# Altium PCB met_dec_pcb.PcbDoc
Units mm, origin at the board's own origin, x right, y up, seen from the top; angles counter-clockwise.
Board outline 90.93 x 38.1 mm, 2 copper layers (Top Layer, Bottom Layer); 8 components, 6 nets, 22 pads, 3 vias.
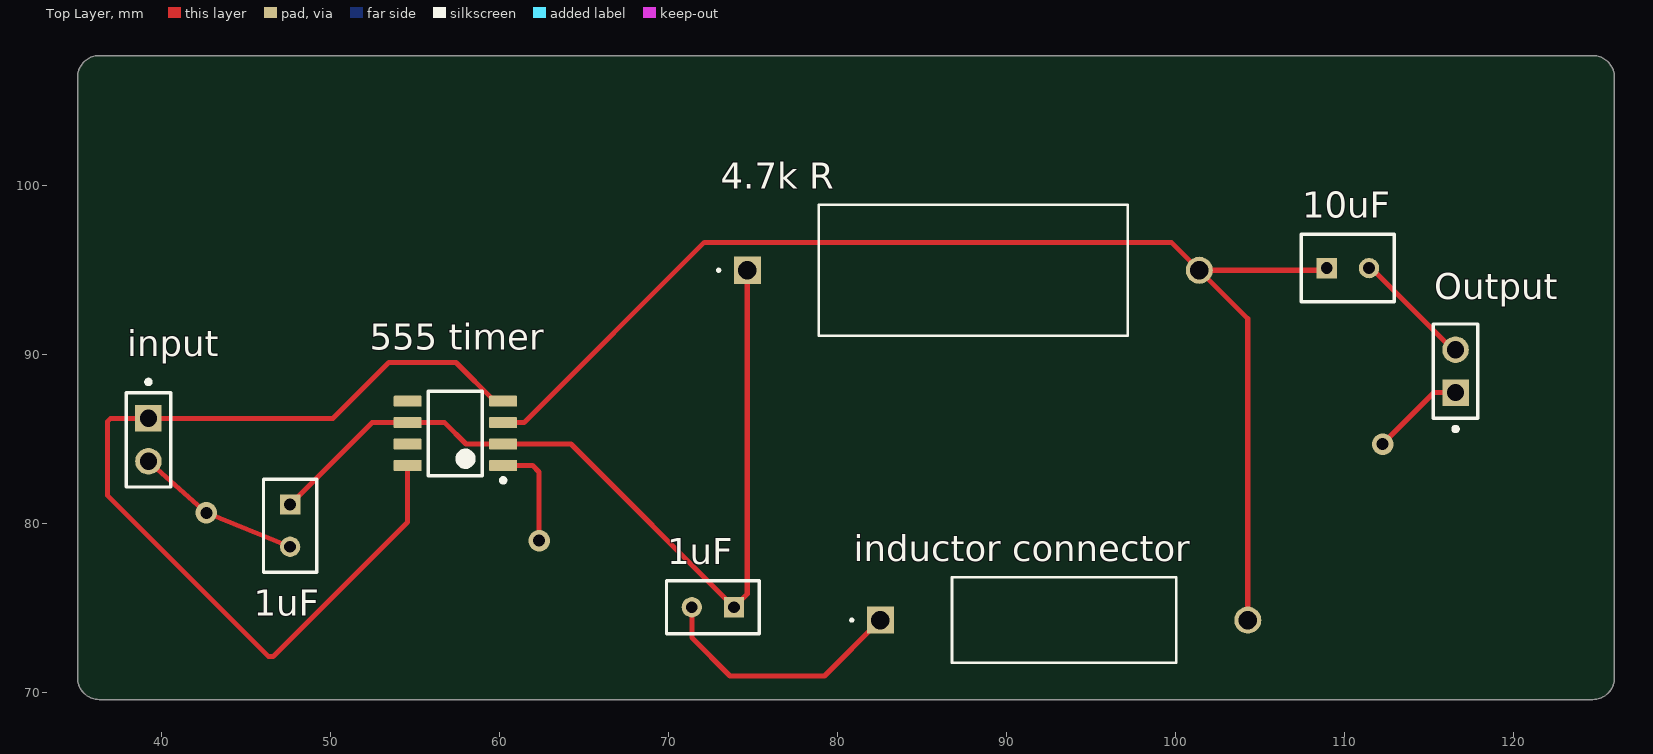
[diagram p0: Top Layer view]
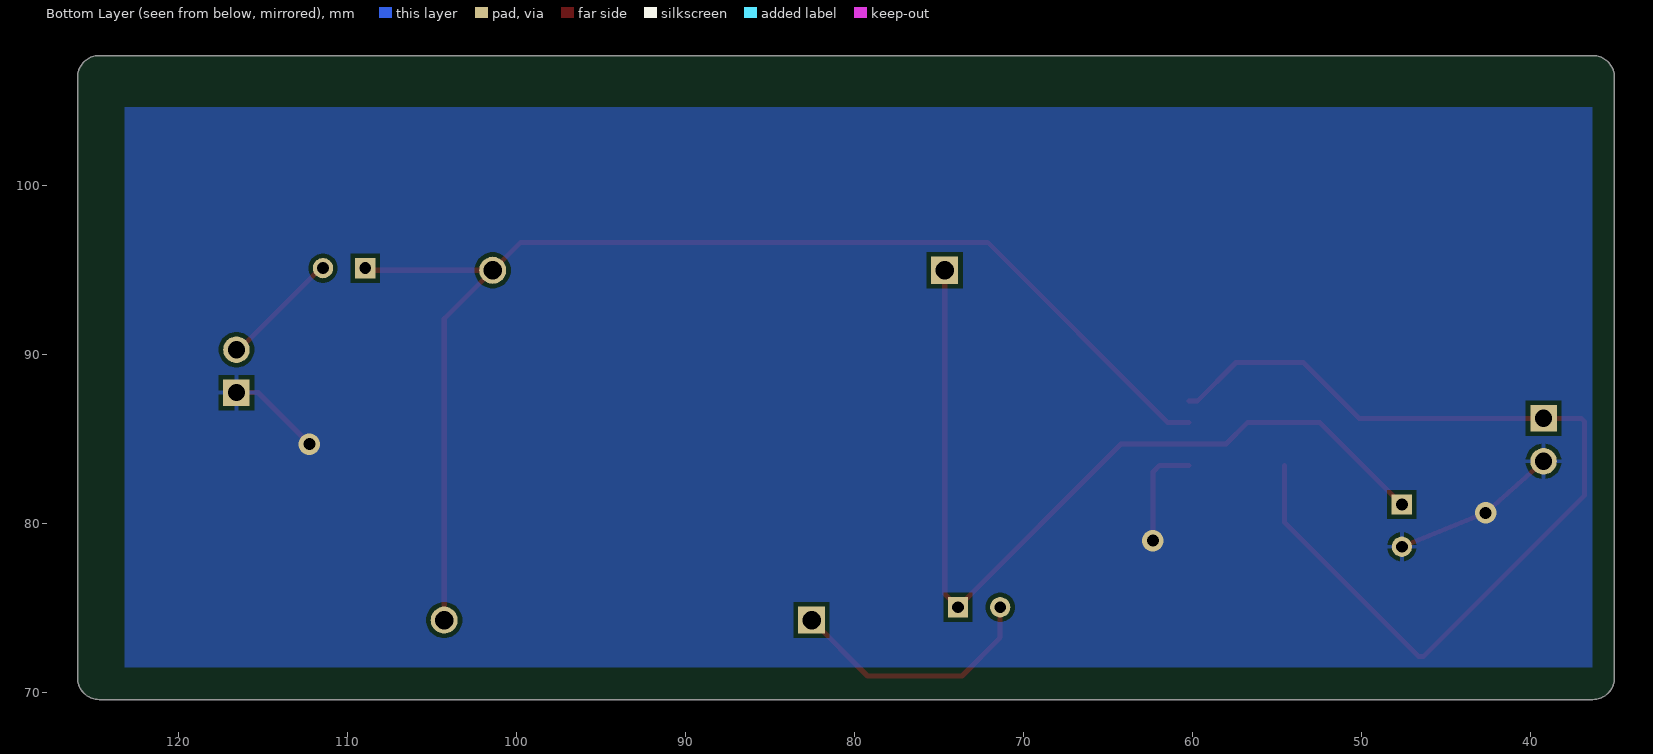
[diagram p1: Bottom Layer view, seen from below]
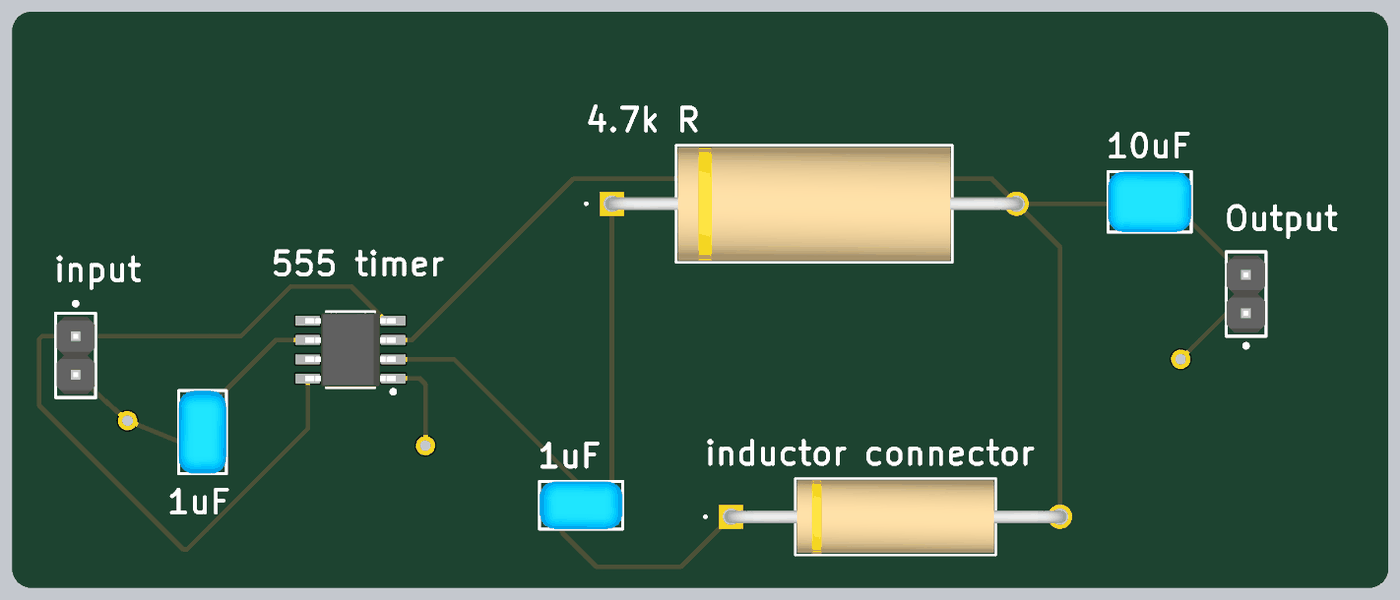
[diagram p2: 3D render of the assembled board from above, using the file's embedded part models]

## Layer stack, top to bottom
Top Solder: solder mask 0.0102, Solder Resist, Dk 3.5
Top Layer: signal copper 0.0356
Dielectric 1: dielectric 0.32, FR-4, Dk 4.8
Bottom Layer: signal copper 0.0356
Bottom Solder: solder mask 0.0102, Solder Resist, Dk 3.5

## Board outline
35.052,70.866 35.052,106.426 cw(c36.322,106.426) 36.322,107.696 124.714,107.696 cw(c124.714,106.426) 125.984,106.426 125.984,70.866 cw(c124.714,70.866) 124.714,69.596 36.322,69.596 cw(c36.322,70.866)

## Design rules (kind name [scope] priority, off if disabled: settings)
Clearance [All] p1: gap=0.254 ignorepadtopadclearanceinfootprint=FALSE
PolygonConnect [All] p1: connectstyle=Relief reliefconductorwidth=0.254 reliefentries=4 polygonreliefangle="90 Angle" airgapwidth=0.254
RoutingVias [All] p1: holewidth=0.711 width=1.27 viastyle="Through Hole" minholewidth=0.711 minwidth=1.27 maxholewidth=0.711 maxwidth=1.27
SolderMaskExpansion [All] p1: expansion=0.102 istentingtop=FALSE
SupplyNets "Schematic Supply Nets" [InNet('GND')] p1: voltage=0.000
Width [All] p1: maxlimit=0.5 minlimit=0.254 preferedwidth=0.3
30 further rules are at their usual default settings.

## Classes and differential pairs
component class MetDecSchem: 1uF "4.7k R" 10uF "555 timer" "inductor connector" input Output

## Components (designator, comment, footprint, x,y, rotation, side; value= is the part's Value field where it differs from the comment)
1uF "RCER71H105K2DBH03A" FP-RCE2A2-MFG 47.625,79.883 r270 top (schematic designator "1uF to ground")
1uF "RCER71H105K2DBH03A" FP-RCE2A2-MFG 72.644,75.057 r180 top (schematic designator "1uF in Tank Circuit")
"4.7k R" "AC05000004701JAC00" RES_AC05_VIS 74.676,94.996 r0 top
10uF "RCER71E106K3DBH03A" FP-RCE3DB-MFG 110.216,95.123 r0 top
"555 timer" "LM555CM" D0008A_M 57.404,85.344 r180 top
"inductor connector" "AC03000003000JAC00" RES_AC03_VIS 82.55,74.295 r0 top
input "M20-9990246" FP-M20-9990246-MFG 39.243,84.963 r270 top (schematic designator "Vcc and GND")
Output "M20-9990246" FP-M20-9990246-MFG 116.586,89.027 r90 top

## Footprints (in the part's own frame and the unit in brackets; to place one, negate y for a bottom-side part, rotate by r counter-clockwise, add the part's x,y. Pads: shape width x height; smd on the part's side, far side on the other; paste and mask are expansions set on the pad)
D0008A_M [mm] "SOIC, 8-Leads, Body 5x4mm, Pitch 1.27mm, IPC Low Density"
  rrect15% 1.65x0.65 smd: 1(-2.825,1.905) 2(-2.825,0.635) 3(-2.825,-0.635) 4(-2.825,-1.905) 5(2.825,-1.905) 6(2.825,-0.635) 7(2.825,0.635) 8(2.825,1.905)
  silkscreen extent -2.95,-2.5 1.6,2.9, body extent -3,-2.45 3,2.45, height 1.63
FP-M20-9990246-MFG [mm]
  rect 1.57x1.57 hole 1.02 paste-2539.97 mask+0: 1(-1.27,0)
  round 1.57 hole 1.02 paste-2539.97 mask+0: 2(1.27,0)
  silkscreen extent -3.55,-1.32 2.79,1.32, body extent -2.89,-1.42 2.89,1.42, height 0.25
FP-RCE2A2-MFG [mm]
  rect 1.2x1.2 hole 0.7 paste-2539.97 mask+0: 1(-1.25,0)
  round 1.2 hole 0.7 paste-2539.97 mask+0: 2(1.25,0)
  silkscreen extent -2.75,-1.58 2.75,1.58, body extent -2.85,-1.68 2.85,1.68, height 0.25
FP-RCE3DB-MFG [mm]
  rect 1.2x1.2 hole 0.7 paste-2539.97 mask+0: 1(-1.25,0)
  round 1.2 hole 0.7 paste-2539.97 mask+0: 2(1.25,0)
  silkscreen extent -2.75,-2 2.75,2, body extent -2.85,-2.1 2.85,2.1, height 0.25
RES_AC03_VIS [mil]
  rect 63x63 / inner round 60 / far side rect 63x63 hole 43 paste-99999 mask+0: 1(0,0)
  round 63 / inner round 60 / far side round 63 hole 43 paste-99999 mask+0: 2(856,0)
  silkscreen extent -69,-100 689,100, body extent -16,-95 873,95, height 189
RES_AC05_VIS [mil]
  rect 63x63 / inner round 60 / far side rect 63x63 hole 43 paste-99999 mask+0: 1(0,0)
  round 63 / inner round 60 / far side round 63 hole 43 paste-99999 mask+0: 2(1053,0)
  silkscreen extent -69,-152 886,152, body extent -16,-147 1069,147, height 295

## Part data
1uF 1uF: library part CMP-06035-042751-1, "Cap Ceramic 1uF 50V X7R ±10% Radial 2.5mm +125°C Automotive Ammo Pack", Capacitance=1uF, Case/Package=Radial, Dielectric=X7R, Max Operating Temperature=125°C, Min Operating Temperature=-55°C, Package Quantity=2000, Ratings=AEC-Q200, Resistor Type=Ceramic, Tolerance=10%, Voltage Rating=50V, Height=4mm, Height - Seated (Max)=0.157inch, Lead Diameter=0.5mm, Lead Pitch=0.098inch, Lead/Base Style=Straight, Length=0.217inch, Mount="Through Hole", Packaging="Tape and Reel", Termination=Radial, Voltage Rating (DC)=50V, Width=0.124inch
"4.7k R": library part CMP-00030-39747417-1, "AC05000004701JAC00 VISHAY AC05000004701JAC00 Through Hole Resistor, AC Series, 4.7 kohm, 5 W, 5%, Axial Leaded", Case/Package=Conformal, Max Operating Temperature=275°C, Max Power Dissipation=5W, Min Operating Temperature=-40°C, Resistance=4.7kΩ, Temperature Coefficient=180ppm/°C, Tolerance=5%, Voltage Rating=153V, Composition=Wirewound, Contact Plating=Tin, Diameter=7.5mm, Features="Flame Retardant Coating", Lead Diameter=800µm, Lead Free="Lead Free", Length=18mm, Military Standard=Not, NexarPartId=39747417, Number of Pins=2, Number of Terminations=2, Packaging="Tape & Box (TB)", Power Rating=5W, Radiation Hardening=No, REACH SVHC=Unknown, RoHS=Compliant, Schedule B="8533210080, 8533210080", Termination=Axial, Voltage Rating (DC)=153V, Width=7.49mm
10uF: library part CMP-06035-005830-1, "Cap Ceramic 10uF 25V X7R ±10% Radial 2.5mm +125°C Automotive Ammo Pack", Capacitance=10uF, Case/Package=Radial, Dielectric=X7R, Max Operating Temperature=125°C, Min Operating Temperature=-55°C, Package Quantity=1500, Ratings=AEC-Q200, Resistor Type=Ceramic, Tolerance=10%, Voltage Rating=25V, Height=5mm, Height - Seated (Max)=0.197inch, Lead Diameter=0.5mm, Lead Pitch=0.098inch, Lead/Base Style=Straight, Length=0.217inch, Mount="Through Hole", Packaging="Tape and Reel", Termination=Radial, Voltage Rating (DC)=25V, Width=0.157inch
"555 timer": library part CMP-00023-00002-2, "Highly Stable 555 Timer for Generating Accurate Time Delays and Oscillation, 4.5 to 16 V, 0 to 70 degC, 8-Pin SOIC (D), Tube", Case/Package=SOIC, Frequency=100kHz, Manufacturer="Texas Instruments (TI)", Max Operating Temperature=70°C, Max Ouput Current=-200mA, Max Supply Voltage=16V, Min Operating Temperature=0°C, Min Supply Voltage=4.5V, Nominal Supply Current=3mA, Package Description="8-Pin Small Outline Integrated Circuit, Body 4.9 x 3.9 mm, Pitch 1.27 mm", Package Quantity=95, Package Reference=D0008A, Package Version="4040047-3/M, 06/2011", Power=1.18W, Channels=1, Datasheet URL=http://www.ti.com/lit/ds/symlink/lm555.pdf, Datasheet Version="SNAS548D, 01/2015", Manufacturer URL=http://www.ti.com/, Mounting Technology=SM, Package URL=http://www.ti.com/lit/ml/msoi002j/msoi002j.pdf, Packaging=Rail/Tube, Pins=8, RoHS Compliant=True
"inductor connector": library part CMP-00030-39746760-1, "AC03000003000JAC00 Res Wirewound 300 Ohm 5% 3W -80ppm/C to -10ppm/C Conformal AXL Thru-Hole Ammo Pack", Case/Package=Axial, Max Operating Temperature=275°C, Max Power Dissipation=3W, Min Operating Temperature=-40°C, Resistance=300Ω, Temperature Coefficient=-80ppm/°C, Tolerance=5%, Voltage Rating=30V, Composition=Wirewound, Contact Plating=Tin, Diameter=4.8mm, Features="Flame Retardant Coating", Lead Diameter=800µm, Length=13mm, Military Standard=Not, NexarPartId=39746760, Number of Pins=2, Number of Terminations=2, Packaging="Cut Tape (CT)", Power Rating=3W, REACH SVHC=Unknown, RoHS=Compliant, Schedule B="8533210080, 8533210080", Termination=Axial, Thickness=4.8006mm, Voltage Rating (DC)=30V, Width=4.8mm
input Output: library part CMP-15831-000009-1, "CONN HEADER VERT 2POS 2.54MM", Current Rating=3A, Manufacturer=Harwin, Temperature="-40°C to +105°C", Temperature Range High=+105°C, Temperature Range Low=-40°C, Automotive=No, Category=Conn, ComponentLink2Description=Datasheet, ComponentLink2URL=https://cdn.harwin.com/pdfs/M20-999.pdf, Conn Gender=Male, Conn Orientation=Vertical, Contact Material=Tin,Nickel, Device Class L1=Connectors, Device Class L2="Headers and Wire Housings", Device Class L3=unset, Digikey Description="CONN HEADER VERT 2POS 2.54MM", Height=8.99mm, Lead Free=Yes, Manufacturer Part Number=M20-9990246, Mouser Description="2.54mm (0.1\") Pitch SIL Vertical PC Tail Pin Header, 6.1mm mating pin height, tin, 2 contacts", Number Of Contacts=2, Number Of Rows=1, Octopart=https://octopart.com/m20-9990246-harwin-2590635, Package=M20-9990246, Pitch=2.54mm, RoHS=TRUE

## Via types
v1: diameter 1.27, hole 0.711, Top Layer to Bottom Layer, 3 vias

## Nets (pads, with @x,y where several pads share a name; then routed paths per layer and width w, separated by ;. In a path a pad name is that pad's centre, name@x,y a point inside that pad or via, vN(x,y) a via of type N, cw(c..) or ccw(c..) an arc to the next point about the centre after c; other vN are vias at no path point)
GND: 1uF.2@47.625,78.633 "555 timer.1" input.2 Output.1 | length 21.9
  Top Layer w0.3: input.2 v1(42.672,80.645) 1uF.2@47.625,78.633 ; 60.229,83.439 61.976,83.439 62.357,83.058 v1(62.357,78.994) ; v1(112.268,84.709) 115.316,87.757 Output.1
"Net1uF in Tank Circuit_1": 1uF.1 "4.7k R.1" "555 timer.2" "555 timer.6" | length 53.1
  Top Layer w0.3: 1uF.1@47.625,81.133 52.471,85.979 54.579,85.979 56.769,85.979 58.039,84.709 60.229,84.709 64.242,84.709 73.894,75.057 74.676,75.839 74.676,94.996
"Net1uF in Tank Circuit_2": 1uF.2@71.394,75.057 "inductor connector.1" | length 15.3
  Top Layer w0.3: 1uF.2@71.394,75.057 71.394,73.259 73.66,70.993 79.248,70.993 82.55,74.295
"Net4.7k R_2": 10uF.1 "4.7k R.2" "555 timer.3" "inductor connector.2" | length 75.8
  Top Layer w0.3: 60.229,85.979 61.468,85.979 72.136,96.647 99.771,96.647 101.422,94.996 ; 104.292,74.295 104.292,92.126 101.422,94.996 ; 10uF.1 108.839,94.996 101.422,94.996
Net10uF_2: 10uF.2 Output.2 | length 7.1
  Top Layer w0.3: 10uF.2 111.613,95.123 116.439,90.297 Output.2
"Net555 timer_4": "555 timer.4" "555 timer.8" input.1 | length 58.5
  Top Layer w0.3: 54.579,83.439 54.579,80.106 46.606,72.133 46.358,72.133 36.83,81.661 36.83,86.057 37.006,86.233 input.1 50.165,86.233 53.467,89.535 57.443,89.535 59.729,87.249 60.229,87.249
pads on no net: "555 timer.5" "555 timer.7"

## Polygon pours and split planes (outlines as drawn)
GND on Bottom Layer "GND_L02_P000" (solid, pour order 0): 123.19,104.648 123.19,71.501 36.366,71.501 36.366,104.648 78.994,104.648